# Altium PCB H3-core.PcbDoc (part 2 of 2)
Units mil, origin at the board's own origin, x right, y up, seen from the top; angles counter-clockwise.
Board outline 1574.8 x 1968.5 mil, 4 copper layers (Top Layer, GND, POWER, Bottom Layer), stack 23.756 mil thick; 157 components, 231 nets, 971 pads, 256 vias.
Unrouted connection lines stored in the file: 149.
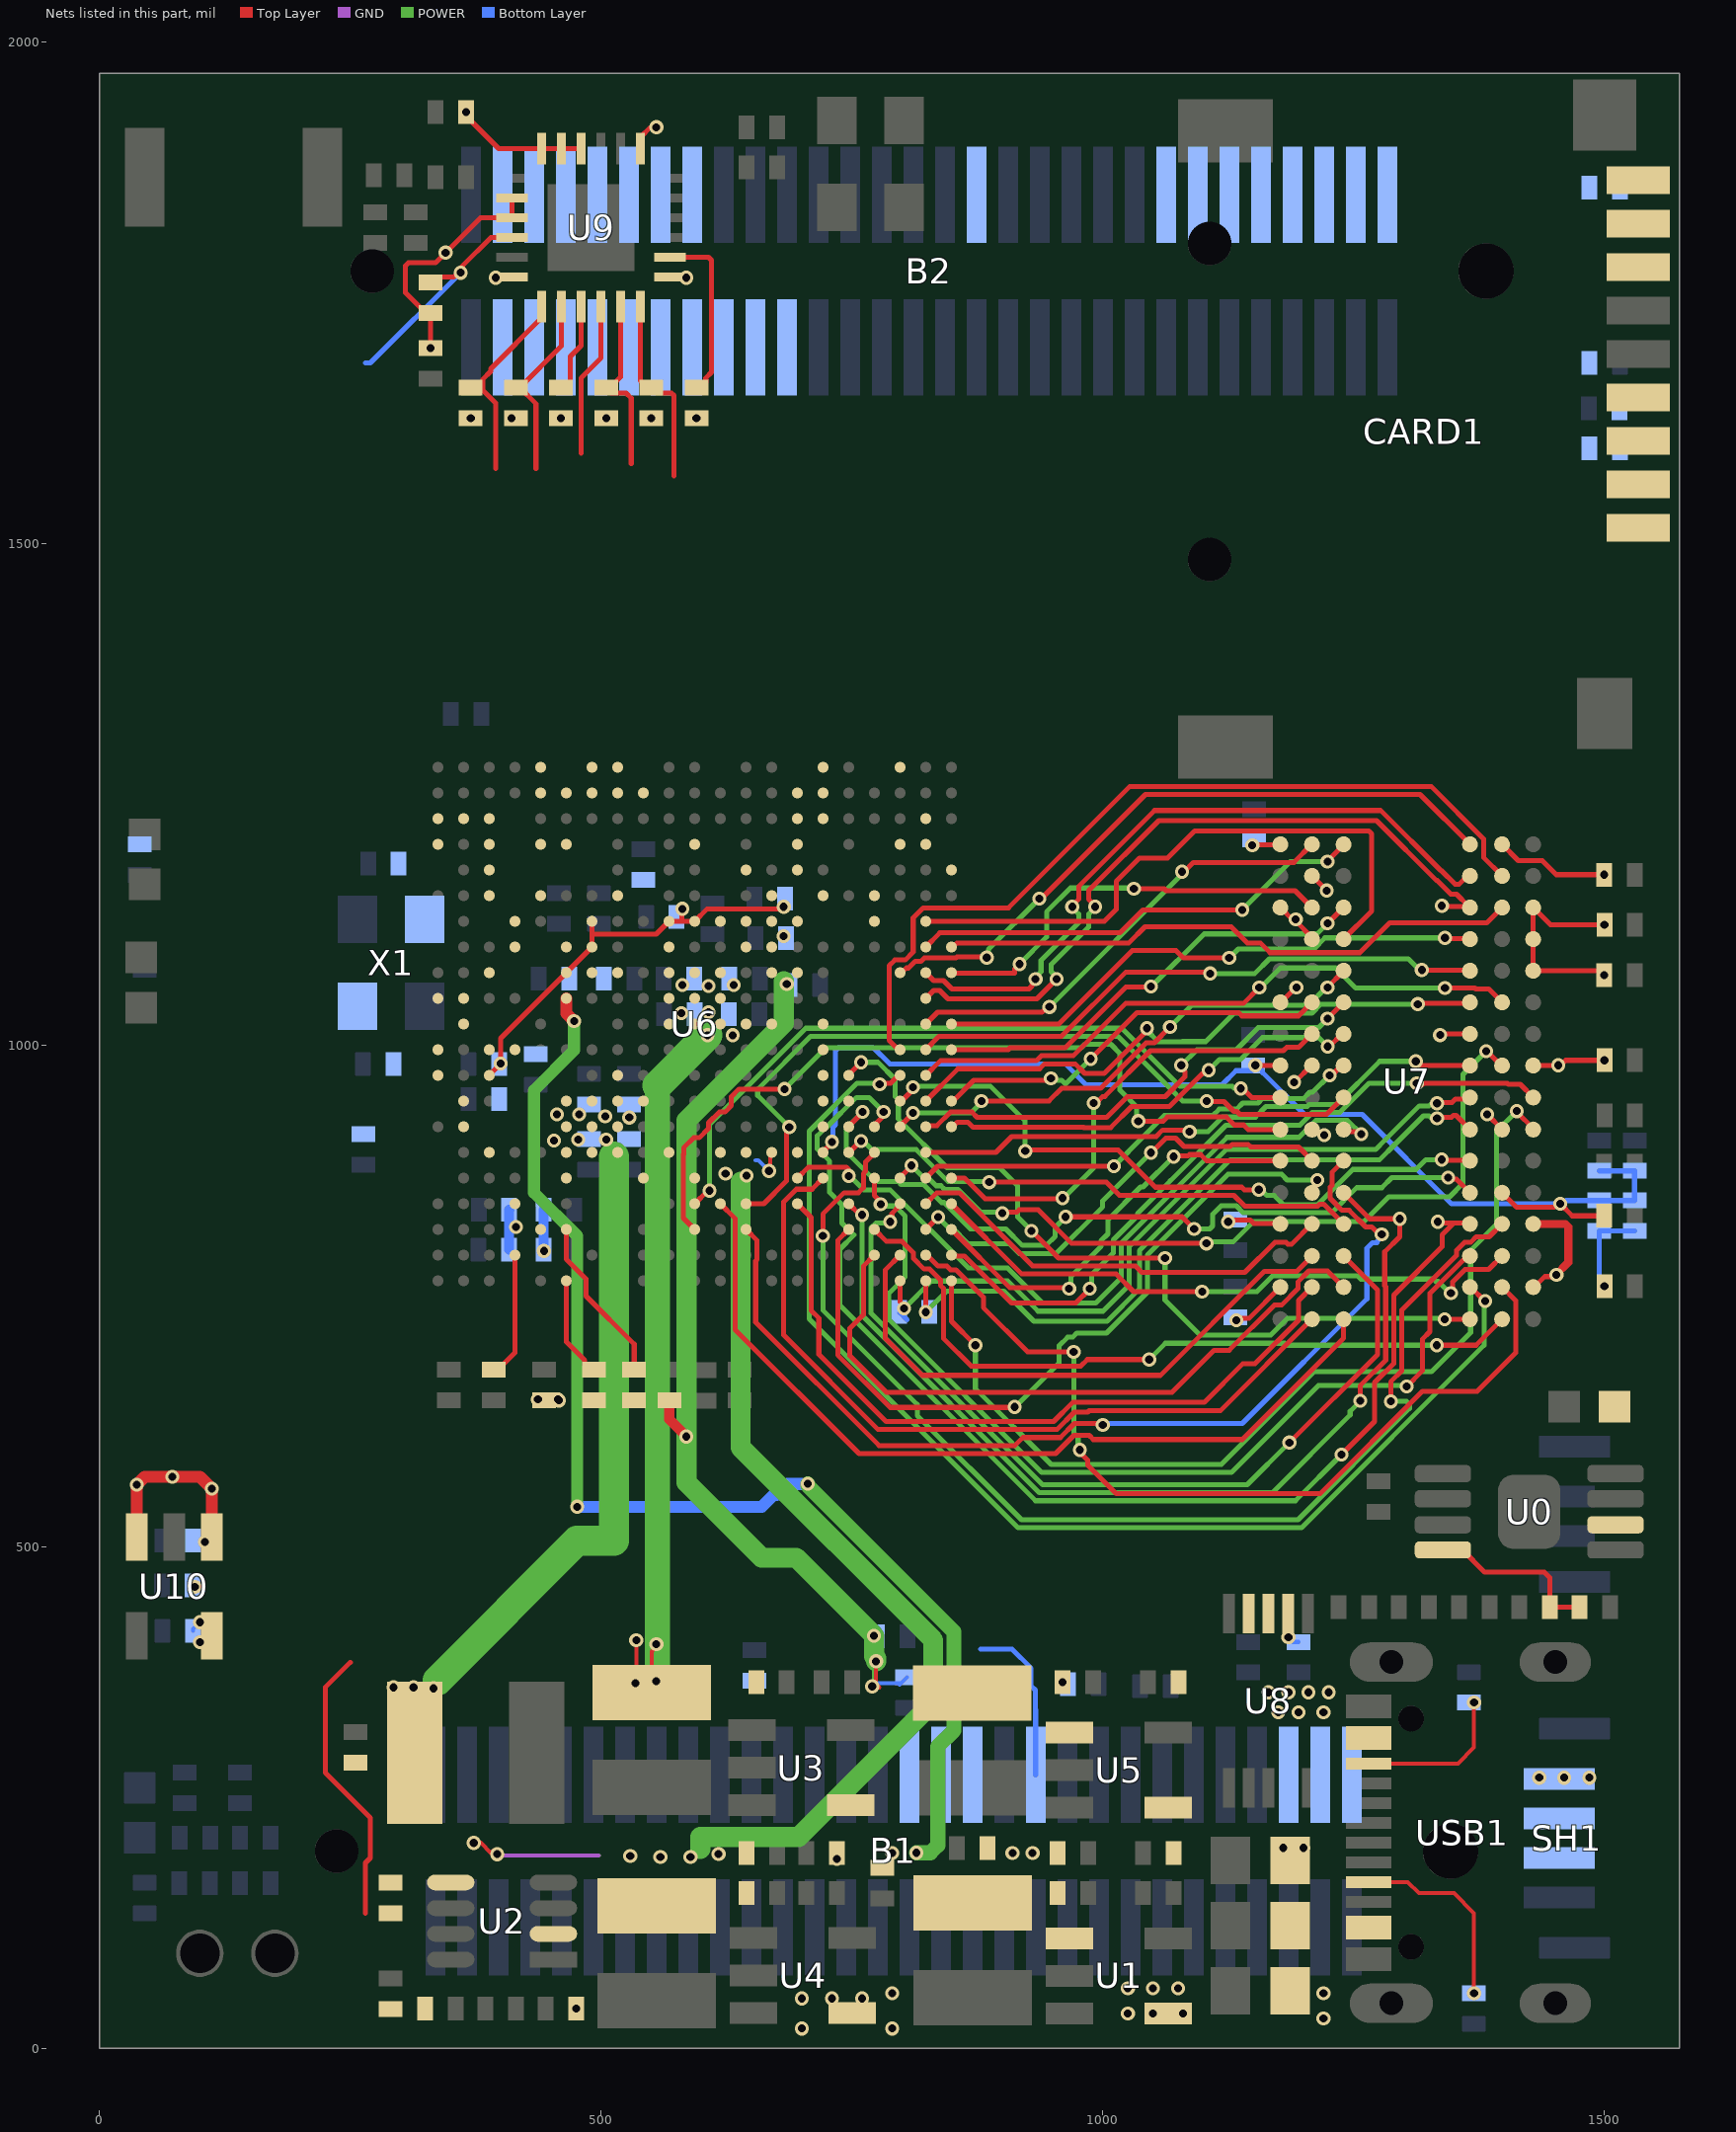
[diagram p4: the nets of this part, all layers, seen from the top]

## Via types
v1: diameter 14, hole 8, Top Layer to Bottom Layer, 255 vias
v2: diameter 15, hole 8, Top Layer to Bottom Layer, 1 vias

## Nets (pads, with @x,y where several pads share a name; then routed paths per layer and width w, separated by ;. In a path a pad name is that pad's centre, name@x,y a point inside that pad or via, vN(x,y) a via of type N, cw(c..) or ccw(c..) an arc to the next point about the centre after c; other vN are vias at no path point) (continued)
NetR33_2: R33.2 USB1.A5 | length 197.8
  Top Layer w4: USB1.A5@1265,165.94 1304.06,165.94 1315,155 1350,155 1370,135 v1(1370,55)
NetR34_2: R34.2 USB1.B5 | length 156.6
  Top Layer w4: USB1.B5@1265,284.06 1354.06,284.06 1370,300 v1(1370,345)
NetR49_1: R49.1 R50.2 U0.4 | length 177.1
  Top Layer w5: U0.4@1339,497 1358.5,497 1380.5,475 1440,475 1445.47,469.53 R49.1@1445.47,440 R50.2@1475.24,440
NMI: R22.2 U6.AA6 | length 102.4
  Top Layer w5: U6.AA6@465.27,765.28 465.27,704.34 483.64,685.97 483.64,682.04 489.01,676.66 R22.2@492.95,676.66
PC4: B2.31 U6.F16
PC7: B2.34 U6.A16
RTC-VIO: C6.2 C12.2 C21.2 C22.2 C25.2 C28.2 C36.1 C40.2 C67.1 CARD1.4 L4.2 L6.2 R13.2 R16.1 R17.1 R21.1 R22.1 R23.1 R24.1 R25.1 R44.2 R45.2 U3.4 U6.G7 U6.G10 U6.G11 U6.G13 U6.G14 U6.G15 U6.H7 U6.H13 U6.H14 U6.J6 U6.J14 U6.J15 U6.N3 | length 1378.2
  Top Layer w4: v1(770.11,361) 771.11,360 777.5,360 774,363.5 v1(774,386)
  Top Layer w5: U6.N3@388.5,970 388.5,970.23 399.79,981.52 399.79,1006.89 U6.J6@465.27,1072.37 U6.H7@490.86,1097.96 490.86,1110.76 ; U6.G7@490.86,1123.55 490.86,1110.76 ; v1@580.43,1135.43 580.43,1123.55 ; v1(682,1138) 679.56,1138 677.56,1136 605.68,1136 U6.G11@593.23,1123.55 580.43,1123.55 ; 490.86,1110.76 554.84,1110.76 U6.G10@567.63,1123.55 580.43,1123.55
  Top Layer w10: R23.1@567.95,645.95 567.95,627.05 v1(585,610)
  POWER w4: v1(770.11,361) 772,362.89 v1@772,391
  POWER w20: v1@682,1064 682,1022 585,925 v1(585,610) 585,564 659.76,489.24 694.24,489.24 v1(772,411.47) 772,391 774,389 v1(774,386)
  Bottom Layer w4: R16.1@398.19,981.19 398.75,981.75 v1(399.79,981.75) ; v1(770.11,361) 773.47,364.36 C28.2@797.36,364.36 ; C28.2@797.5,362.5 797.5,364.36 799.13,364.36 C28.2@805,370.24
  other v1: 959.76,365 458,646 437,647 457,647 685,1061 681.9,1108.86 581,1136
S-TWI-SCK: B1.44 U6.N1
S-TWI-SDA: B1.45 U6.M1
SA0: U6.T17 U7.N3 | length 533.8
  Top Layer w5: U6.T17@746.77,893.23 747.24,893.23 758.51,904.5 v1(758.97,904.5) ; v1(886.76,863.5) 1003.67,863.5 1016.67,850.5 1130.69,850.5 1141.69,839.5 1214.1,839.5 1216.23,841.63 1220.37,841.63 U7.N3@1240,822
  POWER w5: v1(758.97,904.5) 761.41,904.5 769.91,896 813.94,896 845.58,864.36 885.9,864.36 v1(886.76,863.5)
SA1: U6.U18 U7.P7 | length 941.2
  Top Layer w5: U6.U18@772.36,867.64 772.36,850.2 778.63,843.94 v1(778.63,841.5) ; v1(1303,660) 1318.5,675.5 1318.5,707.01 1326,714.51 1326,752.69 1363.31,790 U7.P7@1365.99,790
  POWER w5: v1(778.63,841.5) 780.35,839.78 792.88,839.78 803,829.66 803,769 786.81,752.81 786.81,726.5 939.16,574.16 1128.16,574.16 1215,661 1302,661 v1(1303,660)
SA2: U6.V19 U7.P3 | length 870.5
  Top Layer w5: v1(788.15,824) 789.87,825.72 789.87,832.35 797.95,840.43 U6.V19@797.95,842.05 ; v1(1186,604) 1274,692 1274,756 U7.P3@1240,790
  POWER w5: v1(788.15,824) 786.8,822.65 773.65,822.65 769,818 769,733 940,562 1144,562 v1(1186,604)
SA3: U6.V20 U7.N2 | length 443.9
  Top Layer w5: U6.V20@823.54,842.05 834.54,853.05 856.95,853.05 930,780 1032.46,780 1038.96,773.5 1141.42,773.5 1171.42,803.5 1182.6,803.5 1184.23,801.87 1188.37,801.87 U7.N2@1208.5,822
SA4: U6.V21 U7.P8 | length 619.2
  Top Layer w5: U6.V21@849.13,842.05 919.18,772 1013.35,772 1030.85,754.5 v1(1099,754.5) ; v1(1346.89,753.07) 1348.61,754.79 1348.61,763.99 1361.13,776.5 1384.49,776.5 U7.P8@1397.99,790
  POWER w5: v1(1099,754.5) 1153.49,754.5 1168.99,770 1254.04,770 1257.04,767 1329.67,767 1332.17,764.5 1334.28,764.5 1345.71,753.07 v1(1346.89,753.07)
SA5: U6.Y19 U7.P2 | length 579.4
  Top Layer w5: U6.Y19@797.95,790.87 783.36,776.28 783.36,751.95 783.12,751.71 783.12,707.88 820,671 1057.49,671 1160.99,774.5 1193.5,774.5 1208.5,789.5 U7.P2@1208.5,790
SA6: U6.Y20 U7.R8 | length 879.9
  Top Layer w5: U6.Y20@823.54,790.87 824.82,790.87 835.69,780 844.44,780 848.16,776.28 853.69,776.28 880.98,748.98 880.98,738.51 924.99,694.5 v1(971,694.5) ; v1(977.1,596.66) 977.1,594.22 984.94,586.38 984.94,581.56 1013.5,553 1216.51,553 1318.51,655 1373,655 1411.49,693.49 1411.49,745.5 U7.R8@1397.99,759
  POWER w5: v1(971,694.5) 971,613.66 975.38,609.28 975.38,598.38 v1(977.1,596.66)
SA7: U6.V15 U7.R2 | length 745.2
  Top Layer w5: U6.V15@695.59,842.05 709.47,828.17 709.47,735.53 717,728 717,692 784,625 951,625 970,644 1101,644 1139.7,682.7 1151.8,682.7 1195,725.9 1195,745.5 U7.R2@1208.5,759
SA8: U6.W18 U7.T8 | length 739
  Top Layer w5: U6.W18@772.36,816.46 784.37,804.45 799.93,804.45 811.25,793.13 811.25,787.6 821.93,776.92 827.45,776.92 838.13,766.25 838.13,760.72 841.13,757.72 841.13,707.87 869,680 977.96,680 984.71,686.75 v1(1046.25,686.75) ; v1(1333,701) 1371.99,701 U7.T8@1397.99,727
  POWER w5: v1(1046.25,686.75) 1062.49,703 1181.09,703 1183.09,701 v1(1333,701)
SA9: U6.Y18 U7.R3 | length 678.4
  Top Layer w5: U6.Y18@772.36,790.87 761.36,779.87 761.36,731.36 747.93,717.93 747.93,690.43 784.36,654 1069,654 1111,696 1126,696 1171,741 1178.1,741 1194.41,757.31 1194.41,764 1205.41,775 1224,775 U7.R3@1240,759
SA10: U6.P19 U7.L7 | length 661.9
  Top Layer w5: U6.P19@797.95,944.41 799.41,944.41 810.74,955.74 v1(810.74,958.06) ; v1(922.66,894.5) 923.81,895.66 1015.34,895.66 1052.5,858.5 1138.51,858.5 1141.02,856 v1(1155.52,855.98) ; v1(1337.77,886.02) 1338.28,885.51 1365.48,885.51 U7.L7@1365.99,885
  POWER w5: v1(810.74,958.06) 811.68,959 888.17,959 897.21,949.96 922.66,924.51 v1(922.66,894.5) ; v1(1155.52,855.98) 1157.95,855.98 1163.71,850.23 1170.77,850.23 1180,841 1214,841 1249.19,876.19 1312.19,876.19 1322.02,886.02 v1(1337.77,886.02)
SA11: U6.N19 U7.R7 | length 1201.1
  Top Layer w5: v1(777.5,961) 778.5,962 788.33,962 796.33,970 U6.N19@797.95,970 ; U7.R7@1365.99,759 1366.56,759 1380.57,744.99 v1(1381.14,744.99)
  POWER w5: v1(777.5,961) 776.49,962 755,962 707.47,914.47 707.47,727.21 915.69,519 1198,519 1379.95,700.95 1379.95,743.8 v1(1381.14,744.99)
SA12: U6.R18 U7.N7 | length 1207.2
  Top Layer w5: U6.R18@772.36,918.82 772.36,920.44 779.78,927.86 779.78,931.78 v1(781.5,933.5) ; v1(1238,592) 1271,625 1271,663.77 1290,682.77 1290,751 1338.42,799.42 1338.42,811.14 1350,822.72 1350,823 ; v1(1334,824) 1335,823 1350,823 ; U7.N7@1365.99,822 1364.99,823 1350,823
  POWER w5: v1(781.5,933.5) 781.5,935.5 779.5,935.5 767,948 754.45,948 724.64,918.19 723.97,918.19 715.47,909.69 715.47,896.74 727.74,884.47 727.74,853.26 740,841 740,822.82 752,810.82 738,796.82 738,741 933,546 1192,546 v1(1238,592)
SA13: U6.V12 U7.T3 | length 859.4
  Top Layer w5: U6.V12@618.82,842.05 633.41,827.46 633.41,716.59 757,593 952.94,593 971.1,611.16 986.47,611.16 990.63,607 1139,607 1240,708 U7.T3@1240,727
SA14: U6.N17 U7.T7 | length 809.3
  Top Layer w5: U6.N17@746.77,970 746.77,970.77 v1(759,983) ; v1(929,815) 948,796 956,788 v1(1062,788) ; v1(1340.84,726.84) 1365.83,726.84 U7.T7@1365.99,727
  POWER w5: v1(759,983) 776,983 793,966 793,949 796.24,945.76 796.24,926.47 844.71,878 897,878 915,860 915,829 v1(929,815) ; v1(1062,788) 1062,746 1097,711 1167.28,711 1184.28,728 1339.68,728 v1(1340.84,726.84)
SA15: U6.R17 U7.M7 | length 789.1
  Top Layer w5: U6.R17@746.77,918.82 746.77,919.32 760.45,933 v1(760.45,933.5) ; v1(963,829) 1078.96,829 v1(1091,817) ; v1(1344.32,868.19) 1346.04,866.46 1352.53,866.46 U7.M7@1365.99,853
  POWER w5: v1(760.45,933.5) 744.47,917.52 744.47,893.53 774,864 796.25,864 799,861.25 821.25,861.25 839.25,843.25 841.76,843.25 868.01,817 903.31,817 919.81,800.5 943.5,800.5 952.39,809.39 952.39,818.39 v1(963,829) ; v1(1091,817) 1106.57,817 1109.5,819.93 1109.5,831.5 1118,840 1133.1,840 1140.1,833 1227.99,833 1252.99,858 1278,858 1288.19,868.19 v1(1344.32,868.19)
SBA0: U6.W17 U7.M2 | length 775
  Top Layer w5: U6.W17@746.77,816.46 735.77,805.46 735.77,691.28 788.05,639 911.63,639 v1(912.13,639.5) ; U7.M2@1208.5,853 1208.5,855.98 1212.16,859.63 1212.16,864.01 v1(1213.88,865.74)
  POWER w5: v1(912.13,639.5) 912.63,639.5 956.5,683.37 956.5,700.51 965,709 970,709 974,713 1003.64,713 1044.5,753.86 1044.5,791.01 1124.99,871.5 1178.1,871.5 1183.87,865.74 v1(1213.88,865.74)
SBA1: U6.T18 U7.N8 | length 1168.6
  Top Layer w5: v1(721,810) 721,831.84 742.21,853.05 756.48,853.05 761.36,857.93 761.36,872.2 763.58,874.42 763.58,883.62 772.36,892.4 U6.T18@772.36,893.23 ; v1(1287,645) 1287,664.51 1298,675.51 1298,736 1352.49,790.49 1352.49,795.59 1360.4,803.5 1366.58,803.5 1372.08,809 1384.99,809 U7.N8@1397.99,822
  POWER w5: v1(721,810) 721,736 815,642 815,631 919,527 1194.69,527 1305.62,637.93 1305.62,642.07 1302.69,645 v1(1287,645)
SBA2: U6.V17 U7.M3 | length 994.9
  Top Layer w5: U6.V17@746.77,842.05 757.82,831 v1(760,831) ; U7.M3@1240,853 1266,827 v1(1296,827) 1296,809 1281,794 1281,760.31 1282,759.31 1282,686.08 1256.5,660.58 v1(1256.5,645.56)
  POWER w5: v1(760,831) 760,730.69 936.69,554 1169,554 1246.51,631.51 1246.51,635.05 1256.5,645.04 v1(1256.5,645.56) ; v1(1296,827) v1@1297,826
SCAS: U6.U15 U7.K3 | length 741
  Top Layer w5: U6.U15@695.59,867.64 U6.U15@695.59,867.64 ; U6.U15@695.64,867.69 706.59,878.64 744.36,878.64 746.02,876.98 746.02,870.58 v1(746.86,869.75) ; U7.K3@1240,916 1242.1,913.9 v1@1252.67,913.9
  POWER w5: v1(746.86,869.75) 747.75,869.75 761.49,856 788,856 866,778 905,778 940,743 993.01,743 1018.5,768.49 1018.5,802.81 1123.88,908.19 1195.5,908.19 1212.31,925 1244,925 v1(1257.5,911.5)
SCK_N: R26.2 U6.AA20 U7.K7 | length 712.4
  Top Layer w5: U6.AA20@823.54,765.28 823.59,765.23 v1(823.63,734) v1(823.63,734) ; v1@1334,928 1347.5,928 1349.5,930 1351.99,930 U7.K7@1365.99,916
  POWER w5: v1(823.63,734) 823.63,734.07 844.56,755 901.28,755 931.28,725 1004.32,725 1036.5,757.18 1036.5,795.36 1127.14,886 1275.99,886 1291.57,901.58 1319.62,929.63 1325.12,929.63 1327.12,927.63 1332.63,927.63 v1(1333.13,927.13)
  Bottom Layer w5: v1(823.63,734) R26.2@827.24,734
SCK_P: R26.1 U6.AA19 U7.J7 | length 742.3
  Top Layer w5: U6.AA19@797.95,765.28 797.95,744.31 802.03,740.23 v1(802.03,737.79) ; v1@1334,943 1348,943 1351.5,946.5 1364.49,946.5 U7.J7@1365.99,948
  POWER w5: v1(802.03,737.79) 829.24,765 905.43,765 935.43,735 1000.18,735 1026.5,761.32 1026.5,799.5 1123,896 1271.85,896 1281.57,905.72 1315.48,939.63 1325.12,939.63 1327.12,941.63 1332.63,941.63 v1(1333.13,942.13)
  Bottom Layer w5: v1(802.03,737.79) 797.69,733.45 804.74,726.4
SCKE0: U6.AA21 U7.K9 | length 961.9
  Top Layer w5: U6.AA21@849.13,765.28 849.13,724.87 v1(873,701) ; v1(1412.65,934.4) 1412.65,933.37 1428.99,917.03 U7.K9@1428.99,916
  POWER w5: v1(873,701) 873,657.63 948.47,582.16 1118.16,582.16 1210.5,674.5 1327.5,674.5 1366.64,713.64 1366.64,795.64 1392.26,821.26 1392.26,914 v1(1412.65,934.4)
SCKE1: U6.Y21 U7.J9 | length 713.2
  Top Layer w5: U6.Y21@849.13,790.87 850.13,789.87 862.13,789.87 909,743 973.01,743 987,756.99 v1(987,757.5) ; v1(1313,962) 1314,961 1319,961 1320,962 1403.08,962 1404.08,961 1415.99,961 U7.J9@1428.99,948
  POWER w5: v1(987,757.5) 988.72,759.22 988.72,771.23 1010.5,793 1010.5,806.13 1034.66,830.29 1034.66,832.34 1067.32,865 1122.7,920.38 1196.38,920.38 1209,933 1236.31,933 1265.31,962 v1(1313,962)
SCS0: U6.W20 U7.L2 | length 467.5
  Top Layer w5: U6.W20@823.54,816.46 v1@835.75,828.71 ; v1(1048,893) 1048.44,893 1062.94,907.5 1072.5,907.5 1081,899 1126.75,899 1129,901.25 1144.75,901.25 1147.5,898.5 1195,898.5 U7.L2@1208.5,885
  POWER w5: v1(835.75,828.75) 846.03,818.48 849.52,818.48 866,802 907,802 916.5,792.5 953.5,792.5 999.89,838.89 999.89,844.89 v1(1048,893)
SCS1: U6.W21 U7.L1 | length 427.6
  Top Layer w5: U6.W21@849.13,816.46 907.09,758.5 965.41,758.5 v1(966.41,757.5) ; v1(1070.49,889) 1071.31,889.81 1084.99,889.81 1086.18,891 1097.44,891 1103.44,885 U7.L1@1177.01,885
  POWER w5: v1(966.41,757.5) 968.14,759.22 968.14,769.41 998.31,799.58 998.31,805.25 1005.11,812.05 1005.11,826.11 1037.69,858.69 1040.19,858.69 v1(1070.49,889)
SDC0-CLK: R47.2 U6.D20
SDC0-CMD: CARD1.3 R45.1 U6.F18
SDC0-D0: CARD1.7 U6.A19
SDC0-D1: CARD1.8 U6.D19
SDC0-D2: CARD1.1 U6.C20
SDC0-D3: CARD1.2 U6.E21
SDC0-DET: CARD1.9 R44.1 U6.G18
SDQ0: U6.N20 U7.F8 | length 633
  Top Layer w5: U6.N20@823.54,970 838.13,984.59 933.73,984.59 938.61,989.48 970.48,989.48 1022.67,1041.67 1140.17,1041.67 v1(1156,1057.5) ; v1(1341,1057) 1370.82,1057 1371.82,1056 1384.73,1056 U7.F8@1397.99,1042.74
  POWER w5: v1(1156,1057.5) 1157.5,1057.5 1177,1077 1232,1077 1252,1057 v1(1341,1057)
SDQ1: U6.P21 U7.F2 | length 407.6
  Top Layer w5: U6.P21@849.13,944.41 850.75,944.41 871.34,965 940.86,965 941.12,965.26 946.57,965.26 v1(948.29,966.98) ; v1(988.01,986.5) 1034.13,1032.62 1135.32,1032.62 1138.7,1029.24 1195,1029.24 U7.F2@1208.5,1042.74
  POWER w5: v1(948.29,966.98) 950.01,965.26 958.82,965.26 962.79,961.28 v1(988.01,986.5)
SDQ2: U6.P20 U7.F7 | length 604.3
  Top Layer w5: U6.P20@823.54,944.41 855.72,976.59 937.04,976.59 941.93,981.48 972.52,981.48 982,972 1001.37,972 1044,1014.63 v1(1044,1017) ; v1@1314.87,1041.87 1363.38,1041.87 1364.25,1041 U7.F7@1365.99,1042.74
  POWER w5: v1(1044,1017) 1044,1014.75 1055.13,1003.62 1079.22,1003.62 1079.26,1003.67 1102.67,1003.67 1131,1032 1208.49,1032 1217.49,1041 v1(1314,1041)
SDQ3: U6.U21 U7.G2 | length 473.7
  Top Layer w5: U6.U21@849.13,867.64 862.13,867.62 882.75,847 959.14,847 v1(959.88,847.74) ; v1(991,942.5) 993.44,942.5 999.94,949 1002.02,949 1047.52,994.5 1179.97,994.5 1183.47,998 1195.26,998 U7.G2@1208.5,1011.24
  POWER w5: v1(959.88,847.74) 960.74,847.74 991,878 v1(991,942.5)
SDQ4: U6.R19 U7.E3 | length 508.2
  Top Layer w5: U6.R19@797.95,918.82 797.95,919.25 810.74,932.04 v1(810.74,932.47) ; v1(879,944.5) 946.32,944.5 958.82,957 997.69,957 1043.19,1002.5 1051.38,1002.5 v1(1067,1018.12) ; v1(1224,1057.5) 1224,1057.87 1240,1073.87 U7.E3@1240,1074.24
  POWER w5: v1(810.74,932.47) 868.47,932.47 879,943 v1(879,944.5) ; v1(1067,1018.12) 1088.88,1040 1205.18,1040 1222.68,1057.5 v1(1224,1057.5)
SDQ5: U6.T20 U7.H7 | length 583.1
  Top Layer w5: U6.T20@823.54,893.23 893.45,893.23 909.22,909 1053.13,909 1059.63,915.5 1085.01,915.5 v1(1086.51,914) ; v1(1312,984) 1316.25,979.75 U7.H7@1365.99,979.75
  POWER w5: v1(1086.51,914) 1105.01,914 1119.39,928.38 1152.07,928.38 1162.69,939 1203.69,939 1205.69,941 1233,941 1276,984 v1(1312,984)
SDQ6: U6.U19 U7.H8 | length 790
  Top Layer w5: U6.U19@797.95,867.64 797.95,868.3 809.22,879.56 v1(809.22,880.22) ; v1(899.78,832.5) 900.78,833.5 914.29,833.5 916.79,836 935.49,836 968.99,802.5 v1(1103.28,802.5) ; v1(1382,994) 1382.87,994 1397.12,979.75 U7.H8@1397.99,979.75
  POWER w5: v1(809.22,880.22) 820.19,869.25 824.57,869.25 833.81,860 838.63,860 842.26,856.36 855.7,856.36 878.56,833.5 898.78,833.5 v1(899.78,832.5) ; v1(1103.28,802.5) 1104.78,804 1130.02,804 1150.52,824.5 1260.5,824.5 1285,849 1345.64,849 1359,862.36 1359,971 v1(1382,994)
SDQ7: U6.U20 U7.H3 | length 462.9
  Top Layer w5: U6.U20@823.54,867.64 835.4,879.5 v1(1010.99,879.5) ; v1(1226,970) 1228.13,970 1237.87,979.75 U7.H3@1240,979.75
  POWER w5: v1(1010.99,879.5) 1041.38,909.88 1061.5,930 1109.69,930 1116.07,936.38 1133.38,936.38 1139.4,942.4 1154.77,942.4 1159.37,947 1200.37,947 1206.51,953.14 1209.14,953.14 v1(1226,970)
SDQ8: U6.J19 U7.A7 | length 666.3
  Top Layer w5: U6.J19@797.95,1072.37 799.57,1072.37 804.2,1077 806.31,1077 813.06,1083.74 818.78,1083.74 822,1086.96 853.69,1086.96 854.73,1088 883,1088 v1@884,1087 ; v1(936.75,1146.25) 938.75,1146.25 1042.49,1250 1316.21,1250 U7.A7@1365.99,1200.22
  POWER w5: v1(884.38,1087.38) 886.1,1089.1 886.1,1095.6 v1(936.75,1146.25)
SDQ9: U6.H20 U7.A3 | length 459.5
  Top Layer w5: U6.H20@823.54,1097.96 837.58,1112 1017,1112 1040,1135 v1(1139,1135) ; v1(1224,1183) 1224,1183.61 1240,1199.61 U7.A3@1240,1200.22
  POWER w5: v1(1139,1135) 1187,1183 v1(1224,1183)
SDQ10: U6.H21 U7.C8 | length 586.5
  Top Layer w5: U6.H21@849.13,1097.96 850.75,1097.96 854.79,1102 1026,1102 1042,1118 1128.01,1118 1144.01,1102 1157,1102 1166.77,1092.23 1256.23,1092.23 1286,1122 1382.76,1122 U7.C8@1397.99,1137.23
SDQ11: U6.J21 U7.C2 | length 419.7
  Top Layer w5: U6.J21@849.13,1072.37 849.5,1072 912,1072 912,1076 v1(917,1081) ; v1(1031,1156) 1061.14,1156 1063.14,1154 1191.73,1154 U7.C2@1208.5,1137.23
  POWER w5: v1(917,1081) 944,1108 944,1133 967.7,1156.7 1030.3,1156.7 v1(1031,1156)
SDQ12: U6.L20 U7.A2 | length 460.6
  Top Layer w5: U6.L20@823.54,1021.19 835.35,1033 939.36,1033 944.57,1038.21 v1(946.79,1038.21) ; v1(1079,1173) 1081.06,1173 1090.28,1182.22 1190.51,1182.22 U7.A2@1208.5,1200.22
  POWER w5: v1(946.79,1038.21) 1077.28,1168.69 1077.28,1171.28 v1(1079,1173)
SDQ13: U6.L21 U7.D7 | length 558.5
  Top Layer w5: U6.L21@849.13,1021.19 956.19,1021.19 1029.5,1094.5 1072.78,1094.5 1080.28,1087 v1(1126,1087) ; v1@1341.48,1106.52 1345,1106.52 1345.16,1106.37 1365.36,1106.37 U7.D7@1365.99,1105.73
  POWER w5: v1(1126,1087) 1135,1096 1210.31,1096 1221.31,1107 v1(1341,1107)
SDQ14: U6.M21 U7.C3 | length 449.5
  Top Layer w5: U6.M21@849.13,995.59 905.67,995.59 907.56,997.48 962.48,997.48 1023,1058 1047.5,1058 v1(1048,1058.5) ; v1(1224,1121.5) 1224.14,1121.5 1239.86,1137.23 U7.C3@1240,1137.23
  POWER w5: v1(1048,1058.5) 1048.5,1058.5 1101,1111 1213.5,1111 v1(1224,1121.5)
SDQ15: U6.M19 U7.B8 | length 842
  Top Layer w5: U6.M19@797.95,995.59 796.33,995.59 786.95,1004.97 786.95,1079.2 792.75,1085 803,1085 811,1093 811,1127 821,1137 906,1137 1027,1258 1327.3,1258 1379.49,1205.81 1379.49,1187.22 U7.B8@1397.99,1168.72
SDQM0: U6.M20 U7.E7 | length 585.8
  Top Layer w5: U6.M20@823.54,995.59 836.95,1009 959,1009 1023,1073 1105.5,1073 v1(1107,1071.5) ; v1@1318.38,1074.62 1364.85,1074.62 1365.23,1075 U7.E7@1365.99,1074.24
  POWER w5: v1(1107,1071.5) 1151.5,1071.5 1166,1086 1304.56,1086 1315.56,1075 v1(1318,1075)
SDQM1: U6.G20 U7.D3 | length 616.1
  Top Layer w5: U6.G20@823.54,1123.55 1001.55,1123.55 1013.5,1135.5 1013.5,1163.5 1036.5,1186.5 1064.5,1186.5 1091.72,1213.72 1265.07,1213.72 1268,1210.79 1268,1133.73 U7.D3@1240,1105.73
SDQS0_N: U6.R21 U7.G3 | length 441
  Top Layer w5: U6.R21@849.13,918.82 850.47,918.82 855.06,923.41 865.44,923.41 870.7,918.16 981.02,918.16 981.17,918 1007.86,918 1028.74,938.88 1066.31,938.88 1091.72,964.29 1098.88,971.45 1099.52,971.45 1103.23,975.16 v1(1105.67,975.16) ; v1(1224.17,998.82) 1225.87,998.82 1238.3,1011.24 U7.G3@1240,1011.24
  POWER w5: v1(1105.67,975.16) 1116.17,985.67 1137.16,985.67 1159.15,1007.66 1215.25,1007.66 1224.09,998.82 v1(1224.17,998.82)
SDQS0_P: U6.R20 U7.F3 | length 484.2
  Top Layer w5: U6.R20@823.54,918.82 824.69,919.97 834.72,919.97 848.16,933.41 869.58,933.41 874.84,928.16 986.02,928.16 986.17,928 1003.72,928 1024.59,948.88 1062.17,948.88 1081.72,968.43 1081.72,974.08 1078.23,977.56 v1(1078.23,980) ; v1(1224,1026.5) 1224,1026.62 1240,1042.62 U7.F3@1240,1042.74
  POWER w5: v1(1078.23,980) 1093.9,995.67 1133.02,995.67 1155.01,1017.66 1215.25,1017.66 1224,1026.41 v1(1224,1026.5)
SDQS1_N: U6.J20 U7.B7 | length 692.6
  Top Layer w5: U6.J20@823.54,1072.37 831.34,1064.57 841.37,1064.57 849.74,1056.21 926.36,1056.21 929.28,1059.14 929.28,1059.81 932.98,1063.51 v1(932.98,1065.94) ; v1(969.56,1138.05) 969.56,1139.09 975.94,1145.48 975.94,1158.31 1051.64,1234 1277,1234 1336.78,1174.22 1337.42,1174.22 1351.03,1160.62 1355.17,1160.62 1363.27,1168.72 U7.B7@1365.99,1168.72
  POWER w5: v1(932.98,1065.94) 932.98,1067.86 938.49,1073.37 938.49,1084.56 975.94,1122.01 975.94,1130.62 969.56,1137.01 v1(969.56,1138.05)
SDQS1_P: U6.K20 U7.C7 | length 726
  Top Layer w5: U6.K20@823.54,1046.78 831.34,1054.57 837.23,1054.57 845.59,1046.21 934.29,1046.21 v1(954,1065.92) ; v1(992.33,1138.05) 992.33,1139.09 985.94,1145.48 985.94,1154.16 1055.78,1224 1272.86,1224 1332.63,1164.22 1333.28,1164.22 1346.89,1150.62 1352.6,1150.62 1364.22,1139 1363.33,1138.11 1338.89,1138.11 v1(1338,1139)
  POWER w5: v1(954,1065.92) 954,1067.84 948.49,1073.35 948.49,1080.42 985.94,1117.87 985.94,1130.62 992.33,1137.01 v1(992.33,1138.05)
SODT0: U6.W11 U7.K1 | length 799.6
  Top Layer w5: U6.W11@593.23,816.46 582,827.69 582,891 582.23,891.23 582.23,897.79 592.26,907.82 597.79,907.82 607.12,917.15 607.12,922.67 617.85,933.41 623.38,933.41 629.82,939.85 629.82,948.82 637.35,956.35 v1(682.8,956.35) ; v1(1035.37,924.38) 1060.33,924.38 1064.45,928.5 1123.01,928.5 1131.03,920.48 1140.27,920.48 1144.75,916 U7.K1@1177.01,916
  POWER w5: v1(682.8,956.35) 723.95,997.5 978.5,997.5 982,1001 1008,1001 1017,992 1017,955.38 1033.65,938.73 1033.65,926.1 v1(1035.37,924.38)
SODT1: U6.V11 U7.J1 | length 723.5
  Top Layer w5: U6.V11@593.23,842.05 606.18,855 v1(608,855) ; v1(1137.39,956.9) 1139.53,956.9 1148.43,948 U7.J1@1177.01,948
  POWER w5: v1(608,855) 608,921 704,1017 1019,1017 1077,959 1129.01,959 1130.77,957.24 1137.06,957.24 v1(1137.39,956.9)
SPI0_CLK: B2.33 U6.B16
SPI0_CS: B2.38 U6.B15
SPI0_MISO: B2.32 U6.C16
SPI0_MOSI: B2.37 U6.C15
SRAS: U6.V13 U7.J3 | length 800.5
  Top Layer w5: U6.V13@644.41,842.05 662.05,842.05 684.59,864.59 684.59,913.1 687.5,916.01 v1(687.5,918.44) ; v1(1103.69,944.5) 1104.32,943.87 1120.69,943.87 1130.6,933.95 1133.55,933.95 1136.5,931 1223,931 U7.J3@1240,948
  POWER w5: v1(687.5,918.44) 656,949.94 656,956 709,1009 1015,1009 1079.5,944.5 v1(1103.69,944.5)
SRST: U6.U16 U7.T2 | length 793
  Top Layer w5: U6.U16@721.18,867.64 710.09,856.55 694.53,856.55 682,844.02 682,711 776,617 954.31,617 971.72,634.41 984.91,634.41 986.5,636 1117.5,636 U7.T2@1208.5,727
STATUS-LED: R15.1 U6.F14
SVREF: C41.2 C42.2 C43.1 C52.2 R31.1 R32.2 U6.T16 U7.H1 U7.M8 | length 1177.7
  Top Layer w5: U6.T16@721.18,893.23 721.18,894.06 729.97,902.86 v1(729.97,903.69) ; v1(1152,980) 1152.13,979.87 1176.88,979.87 U7.H1@1177.01,979.75 ; U7.M8@1397.99,853 1400,853 1400,850.99 1412.49,838.5 v1@1450.06,838.5 ; v1(1456,842) 1468,830 C41.2@1499.76,830
  Bottom Layer w5: v1(729.97,903.69) 731,904.72 731,918.19 733.5,920.69 733.5,994.57 736.43,997.5 771.5,997.5 787.52,981.48 962.52,981.48 983.34,960.66 1118.87,960.66 1132.83,974.63 1148.56,974.63 1153.94,980 1159.31,974.63 1159.31,972.69 1201,931 1258.51,931 1347.51,842 v1(1456,842) ; v1@1461.67,845.24 R31.1@1495,845.24 C43.1@1530,845.24 C52.2@1530,874.76 R32.2@1495,874.76
SWE: U6.W13 U7.L3 | length 1002.2
  Top Layer w5: U6.W13@644.41,816.46 655.41,805.46 655.41,786.31 654,784.9 654,724 777,601 912.31,601 920.31,609 957.63,609 971.63,623 998.5,623 v1(1000,621.5) ; U7.L3@1240,885 1228.38,873.38 1228.38,860.47 1226.5,858.59 1226.5,847.41 1238.41,835.5 1245.59,835.5 1262.09,819 1268.07,819 1275.56,811.51 v1(1278,811.51)
  Bottom Layer w5: v1(1000,621.5) 1001.5,623 1139,623 1263.25,747.25 1263.25,797.75 1268.75,803.24 1273.31,803.24 1273.31,804.38 1278,809.07 v1(1278,811.51)
UART0_RX: B2.55 U6.H6 U8.8
UART0_TX: B2.57 U6.F5 U8.9
UART1_CTS: B2.4 U6.E3
UART1_RTS: B2.2 U6.C3
UART1_RX: B2.3 U6.D3
UART1_TX: B2.5 U6.G4
UART2_CTS: B2.53 U6.E13
UART2_RTS: B2.56 U6.D6
UART2_RX: B2.58 U6.D5
UART2_TX: B2.54 U6.D11
UART3_CTS: B2.36 U6.D15
UART3_RX: B2.44 U6.G12
UART3_TX: B2.35 U6.E15
UBOOT: R25.2 U6.W6 | length 168.1
  Top Layer w5: U6.W6@465.27,816.46 465.27,786.73 485,767 485,750 532.95,702.05 R25.2@532.95,676.43
USB0-DRVVBUS: B1.43 U6.P2
USB0-IDDET: B2.59 U6.D1
USB-5V: B1.31 B1.32 B1.33 C1.2 C3.2 C8.2 C11.2 C54.2 C55.2 C56.2 C57.2 C59.1 C77.2 R43.2 SH1.1 U0.6 U1.1 U1.4 U2.2 U4.4 U5.1 U5.4 U8.7 U10.1 U10.3 USB1.A4B9 USB1.B4A9 | length 333.2
  Top Layer w4: v1(373,205) 380,205 390,195 392.5,197.5 v1(396.25,193.75) ; v1(735,189) C8.2@735,195
  Top Layer w12: U10.3@37.05,509.85 v1(37.05,562.05) 45,570 100,570 v1(111.85,558.15) U10.1@111.85,509.85
  GND w4: v1(396.25,193.75) 397.5,192.5 497.5,192.5
  Bottom Layer w4: v1(1185,410) 1189.76,405.24 C54.2@1195,405.24
  other v1: 700,20 790,20 1220,30 1025,35 1050,35 1080,35 475.24,40 700,50 730,50 760,50 790,55 1220,55 1025,60 1050,60 1075,60 1180,200 1200,200 1435,270 1460,270 1485,270 1175,335 1195,335 1220,335 1165,355 1185,355 1205,355 1225,355 95,460 105,505 72.5,570
USB-DM0: B2.6 U6.B5
USB-DM1: SH1.3 U6.B6
USB-DM2: B2.8 U6.A7
USB-DM3: B2.11 U6.B8
USB-DP0: B2.7 U6.A5
USB-DP1: SH1.2 U6.B7
USB-DP2: B2.9 U6.A8
USB-DP3: B2.10 U6.B9
VCC-CPU-1.5V: C4.2 C13.2 C14.2 C15.2 C16.2 L2.2 R4.2 U2.5 U6.N8 U6.P6 U6.P7 U6.P8 U6.P9 U6.R6 U6.R7 U6.R8 U6.T6 U6.T7 U6.T8 U6.U6 U6.U9 | length 616.5
  POWER w30: 337,367 476,506 513,506 513,888.96
  other v1: 333,359 293,360 313,360 453,905 477,906 505,906 528,928 504,929 456,931 478,931
VCC-DRAM: C9.2 C43.2 C44.2 C45.2 C46.2 C47.2 C48.2 C49.2 C50.2 C51.2 L5.2 R11.2 R31.2 U6.L16 U6.M16 U6.N16 U6.P16 U6.P17 U6.R16 U6.T12 U6.T13 U6.T14 U6.T15 U6.U11 U7.A1 U7.A8 U7.B2 U7.C1 U7.C9 U7.D2 U7.D9 U7.E9 U7.F1 U7.G7 U7.H2 U7.H9 U7.K2 U7.K8 U7.N1 U7.N9 U7.R1 U7.R9 | length 1875.2
  Top Layer w4: v1(667.25,874.75) 668.66,876.17 668.66,891.89 U6.T14@670,893.23
  Top Layer w5: v1(1125,824) 1126.72,825.72 1139.16,825.72 1139.3,825.86 1147.01,825.86 1150.37,822.5 1176.51,822.5 U7.N1@1177.01,822 ; v1(1133,726) 1134.72,727.72 1145.73,727.72 U7.R1@1177.01,759 ; v1(1149,1199.22) 1149.5,1199.72 1176.51,1199.72 U7.A1@1177.01,1200.22 ; U7.F1@1177.01,1042.74 1177.62,1042.74 1192.38,1057.5 v1(1193,1057.5) ; U7.C1@1177.01,1137.23 v1@1190.52,1123.72 ; v1(1190.75,963.25) 1191.38,963.25 1207.87,979.75 U7.H2@1208.5,979.75 ; v1(1192.3,1125.5) v1@1190.52,1123.72 ; U7.K2@1208.5,916 1211.48,916 1215.26,912.22 1219.05,912.22 v1(1220.77,910.5) ; U7.D2@1208.5,1105.73 1208.5,1107.52 1192.3,1123.72 v1@1190.52,1123.72 ; U7.B2@1208.5,1168.72 1208.59,1168.72 1223.11,1154.2 v1(1223.19,1154.2) ; v1@1337,1011 1337.12,1011.12 1365.63,1011.12 1365.75,1011 U7.G7@1365.99,1011.24 1365.99,1011.01 U7.G7@1366.23,1011.01 ; v1(1383,931) U7.K8@1397.99,916 ; U7.A8@1397.99,1200.22 1414.21,1184 1438,1184 1452,1170 v1(1499.76,1170) ; U7.R9@1428.99,759 1430.08,759 1440.5,769.42 1450.42,769.42 v1(1452.14,771.14) 1452.14,771.71 1458.07,777.64 ; U7.H9@1428.99,979.75 1429.12,979.87 1453.87,979.87 v1(1454,980) 1456.44,980 1461.44,985 v1(1500,985) ; v1(1499.76,1070) 1495.53,1074.24 U7.E9@1428.99,1074.24 U7.D9@1428.99,1105.73 U7.C9@1428.99,1137.23 1446.22,1120 v1(1500,1120) C49.2@1499.76,1120.24
  Top Layer w8: U7.N9@1428.99,822 1461.07,822 1464,819.07 1464,783.57 1458.07,777.64
  POWER w20: 599,199 599,211 697,211 831,345 831,407 639,599 639,864
  Bottom Layer w4: 654,885.5 656.5,885.5 v1(667.25,874.75)
  Bottom Layer w5: v1(1125,824) 1129.76,824 C51.2@1132,826.24 ; v1(1500,760) 1500,762 1495,767 R31.2@1495,814.76 C43.2@1530,814.76
  other v1: 559,191 589,191 529,192 617,194 645,870 624,872 1336.19,1010.19
VCC-IO-EN: B1.41 U6.R2 | length 166.5
  Bottom Layer w5: 878,398 909.7,398 928.58,379.12 928.58,361.42 932.78,357.22 932.78,337.94 933.07,337.65 B1.41@933.07,272.83
VCC-RTC: C2.2 L1.2 R1.2 R3.2 R7.2 U6.K6 | length 1235.8
  Top Layer w12: U6.K6@465.27,1046.78 465.27,1031.73 v1(473,1024)
  POWER w12: v1(473,1024) 473,995 433,955 433,853 476,810 v1(476,540)
  POWER w15: v1(706.06,563.06) 706.06,560.94 851.5,415.49 851.5,317 835.5,301 835.5,202.5 828.11,195.11 v1(814.11,195.11)
  Bottom Layer w12: v1(476,540) 660.06,540 671.73,551.67 675.06,551.67 686.06,562.67 705.67,562.67 v1(706.06,563.06)
  other v1: 790,195 910,195 930,195
VCC-SYS-1.2V: C7.2 C17.2 C18.2 C19.2 C20.2 L3.2 R5.1 R9.2 U6.H10 U6.J10 U6.J11 U6.J12 U6.K10 U6.K11 U6.K12 U6.L10 U6.L11 U6.L12 U6.L13 U6.L14 | length 772
  Top Layer w4: v1(535,407) 535,370.24 L3.2@550.24,355 550.24,365 550.24,395.53 555,400.29 v1(555,403)
  POWER w25: v1@556,367 556,388 556,444 556,960
  POWER w30: 556,960 v1(606,1010)
  other v1: 534,364 555,366 631,1010 580,1032 607,1033 607,1059 581,1060 632,1060
VCC-WIFI: C58.1 C60.1 C64.1 R35.2 R36.2 R37.2 R38.2 R39.2 R40.2 R41.2 U9.1 U9.4 U9.5 U9.6 U9.8 U9.9 U9.12 U9.19 U10.5 | length 419.9
  Top Layer w4: v1(410.5,1625) R38.2@415,1625
  Top Layer w5: v1(330,1695) R35.2@330,1729.76 324.63,1735.14 319.86,1735.14 305,1750 305,1777.07 307.93,1780 335,1780 379.84,1824.84 U9.9@411.26,1824.84 U9.8@411.26,1844.53 ; v1(365.47,1930) 365.47,1926.06 397.8,1893.74 U9.6@440.79,1893.74 U9.5@460.47,1893.74 U9.4@480.16,1893.74 ; U9.1@539.21,1893.74 539.21,1904.96 549.25,1915 v1(555,1915)
  Bottom Layer w4: C60.1@93.42,416.42 93.42,418.42 v1(100,425)
  other v1: 100,405 370,1625 460,1625 505,1625 550,1625 595,1625 395,1765 585,1765 345,1790
VDD-CPUS: C23.2 C35.2 U6.J7 U6.J8 U6.M4
VDD-EPHY: C39.2 R5.2 U6.F8
VDD_CPUFB: C5.2 R4.1 R6.2 U6.T10 | length 281.1
  Top Layer w5: 250,385 225,360 225,275 270,230 270,190 265,185 265,135
VRA1: C26.2 U6.Y4 | length 125.5
  Top Layer w5: C26.2@392.95,676.43 396.89,676.43 414.09,693.63 U6.Y4@414.09,790.87
VRA2: C24.2 R19.1 U6.W5 | length 40
  Bottom Layer w10: C24.2@442.71,796.19 R19.1@442.71,836.19
  other v1: 443,795
VRP: C27.2 C29.2 U6.V4 | length 40.1
  Bottom Layer w10: C27.2@408.19,796.19 408.3,796.31 408.3,836.07 C29.2@408.42,836.19
  other v1: 415,819
WL-PMU-EN: R35.1 U6.T3 U9.10 | length 235.1
  Top Layer w5: R35.1@330,1760.24 335.37,1765.61 353.17,1765.61 357.56,1770 v1(360,1770) 361.72,1771.72 361.72,1776.72 390.16,1805.16 U9.10@411.26,1805.16
  Bottom Layer w5: 265,1680 270,1680 v1(360,1770)
WL-SDIO-CLK: U6.J3 U9.16 | length 154.5
  Top Layer w5: 480,1590 480,1665 499.84,1684.84 U9.16@499.84,1736.26
WL-SDIO-CMD: R39.1 U6.L2 U9.15 | length 91.4
  Top Layer w5: R39.1@460,1655.47 463.94,1655.47 469.31,1660.85 469.31,1686.5 480.16,1697.35 U9.15@480.16,1736.26
WL-SDIO-D0: R40.1 U6.H4 U9.17 | length 183.5
  Top Layer w5: U9.17@519.53,1736.26 519.53,1666.07 508.94,1655.47 R40.1@505,1655.47 510.37,1650.1 524.9,1650.1 530,1645 530,1580
WL-SDIO-D1: R41.1 U6.F3 U9.18 | length 193.4
  Top Layer w5: U9.18@539.21,1736.26 539.21,1662.33 546.06,1655.47 R41.1@550,1655.47 555.37,1650.1 569.9,1650.1 572.45,1647.55 572.45,1567.45
WL-SDIO-D2: R37.1 U6.C2 U9.13 | length 191
  Top Layer w5: 395,1575 395,1640 381.97,1653.03 381.97,1663.74 390,1671.77 390,1674.25 440.79,1725.04 U9.13@440.79,1736.26
WL-SDIO-D3: R38.1 U6.C1 U9.14 | length 189.1
  Top Layer w5: R38.1@415,1655.47 R38.1@418.94,1655.47 ; 435,1575 435,1639.41 R38.1@418.94,1655.47 ; U9.14@460.47,1736.26 460.47,1697.01 R38.1@418.94,1655.47
WL-WAKE-AP: R36.1 U6.M3 U9.20 | length 177.8
  Top Layer w5: U9.20@568.74,1785.47 607.07,1785.47 610,1782.54 610,1670.71 604.31,1665.02 604.31,1661.08 598.94,1655.71 R36.1@595,1655.71
XIN: C37.2 U6.K1 X1.1
XOUT: C38.2 U6.K2 X1.3
pads on no net: B1. B2. CARD1. H1.0 SH1.0 U0.9 U2.1 U6.A1 U6.AA2 U6.AA8 U6.AA9 U6.AA11 U6.AA12 U6.AA14 U6.AA15 U6.AA17 U6.AA18 U6.B2 U6.F10 U6.K4 U6.L5 U6.P3 U6.T5 U6.U4 U6.V1 U6.V5 U6.W1 U6.W9 U6.W12 U6.W15 U6.Y2 U6.Y7 U6.Y8 U6.Y9 U6.Y10 U6.Y11 U6.Y12 U6.Y13 U6.Y14 U6.Y15 U6.Y16 U6.Y17 U8.4 U8.5 U8.6 U9.11 U9.21 U10.4 USB1. USB1.1 USB1.2 USB1.3 USB1.4 USB1.A8 USB1.B8

## Polygon pours and split planes (outlines as drawn)
VCC-DRAM on Top Layer "VCC-DRAM_L01_P017" (solid, pour order 17): 588,860 598,860 598,868 608,870 682,870 695,884 757,946 749,954 747,952 728,952 728,1027 727,1028 713,1028 713,919 698,904 616,904 585,873 585,863
RTC-VIO on Top Layer "RTC-VIO_L01_P015" (solid, pour order 15): 635,1135 635,1090 639,1086 660,1086 660,1067 666,1061 667,1062 705,1062 705,1084 706,1085 682,1085 682,1109 685,1112 706,1112 706,1135
VCC-SYS-1.2V on Top Layer "VCC-SYS-1.2V_L01_P012" (solid, pour order 12): 678,1029 679,1028 679,1011 558,1011 555,1014 555,1108 578,1108 579,1109 581,1107 581,1087 603,1087 605,1085 628,1085 628,1067 629,1060 629,1032 672,1032
VCC-CPU-1.5V on Top Layer "VCC-CPU-1.5V_L01_P011" (solid, pour order 11): 506,979 526,979 526,958 529,955 549,955 549,935 544,930 527,930 527,887 498,887 475,864 475,858 455,858 453,860 453,950 460,957 505,957
NetL2_1 on Top Layer "NETL2_1_L01_P008" (solid, pour order 8): 465,260 490,235 490,125 485,120 410,120 410,180 405,185 405,260
USB-5V on Top Layer "USB-5V_L01_P007" (solid, pour order 7): 960,325 1055,325 1100,280 1070,250 1015,250 1015,265 985,295 975,295
USB-5V on Top Layer "USB-5V_L01_P002" (solid, pour order 2): 1100,270 1120,270 1170,220 1170,185 1110,185 1100,195 1090,185 1070,185 1070,195 1040,225 1040,235
USB-5V on Top Layer "USB-5V_L01_P001" (solid, pour order 1): 1265,130 1240,130 1225,145 1225,200 1210,215 1160,215 1160,40 1155,35 1170,20 1230,20 1230,95 1245,110 1285,110
USB-5V on Top Layer "USB-5V_L01_P000" (solid, pour order 0): 1202.5,420 1180,420 1070,375 1070,340 1090,340 1090,295 1080,285 1040,285 1040,225 1105,225 1105,300 1115,310 1220,310 1220,305 1230,295 1235,300 1257.5,300
VCC-DRAM on Bottom Layer "VCC-DRAM_L04_P019" (solid, pour order 19): 622,917 804,917 1120,1233 1121,1232 1566,1232 1566,699 626,699 623,702
USB-5V on Bottom Layer "USB-5V_L04_P004" (solid, pour order 4): 1175,225 1255,225 1255,370 1175,370
USB-5V on POWER "USB-5V_L03_P003" (solid, pour order 3): 270,200 275,195 1155,195 1155,390 1375,390 1490,275 1490,5 270,5
USB-5V on POWER "USB-5V_L03_P009" (solid, pour order 9): 375,10 205,180 205,520 130,595 5,595 5,5
VCC-WIFI on POWER "VCC-WIFI_L03_P010" (solid, pour order 10): 310,1605 610,1605 610,1640 615,1645 495,1645 495,1760 575,1760 580,1755 600,1755 600,1930 610,1940 340,1940 340,1825 305,1790

## Keep-outs
Keep-Out Layer:
  the board outline again, w10

## Other copper
Top Layer:
  rectangle net RTC-VIO: 758,353 785,423
  rectangle net VCC-SYS-1.2V: 526,359 564,413
  rectangle net VCC-DRAM: 504,155 652,208
  rectangle net RTC-VIO: 452,642 560,653
  rectangle net VCC-CPU-1.5V: 245,275 305,295
  rectangle net USB-5V: 380,105 400,210
  rectangle net USB-5V: 370,185 405,210
  rectangle net NetC5_1: 350,30 365,75
  rectangle net NetC5_1: 280,60 365,75
  rectangle net RTC-VIO: 745,340 810,380
  rectangle net NetR13_1: 1005,325 1030,375
  rectangle net NetR13_1: 1005,315 1075,335
  rectangle net RTC-VIO: 730,230 805,250
  rectangle net RTC-VIO: 785,230 805,310
  rectangle net RTC-VIO: 785,295 830,380
  rectangle net VCC-SYS-1.2V: 590,355 660,375
  rectangle net NetC5_1: 275,65 295,120
  rectangle net NetC5_1: 275,105 345,120
  rectangle net VDD_CPUFB: 255,30 270,140
  rectangle net VDD_CPUFB: 255,30 300,45
  rectangle net VDD_CPUFB: 255,130 300,140
  rectangle net VCC-CPU-1.5V: 285,160 360,285
  rectangle net USB-5V: 390,105 465,120
  rectangle net VDD_CPUFB: 280,30 330,45
  rectangle net NetC5_1: 350,30 390,50
  rectangle net VCC-RTC: 765,175 830,195
  rectangle net VCC-RTC: 810,155 830,195
  rectangle net NetR11_1: 690,100 710,165
  rectangle net NetR11_1: 690,100 755,120
  rectangle net NetL3_1: 495,230 670,255
  rectangle net NetR9_1: 710,305 730,360
  rectangle net NetR9_1: 680,355 725,375
  rectangle net RTC-VIO: 905,355 960,375
  rectangle net NetL6_1: 815,230 970,250
  rectangle net VCC-DRAM: 595,145 645,165
  rectangle net NetR11_1: 665,145 710,165
  rectangle net NetL5_1: 555.24,25 675,47.76
  rectangle net USB-5V: 690,10 800,65
  rectangle net VCC-RTC: 915,185 955,210
  rectangle net VCC-RTC: 880,145 930,210
  rectangle net VCC-RTC: 945,145 965,210
  rectangle net USB-5V: 985,100 1025,125
  rectangle net USB-5V: 1005,60 1025,125
  rectangle net NetR1_1: 980,145 1035,165
  rectangle net NetR1_1: 1035,100 1050,145
  rectangle net NetL1_1: 905,25 990,45
  rectangle net USB-5V: 1010,25 1090,70
POWER:
  rectangle net VCC-DRAM: 618,863 675,886
  rectangle net VCC-DRAM: 518,180 624,207
  region net RTC-VIO: 785,353 785,421 759,421 759,353
  rectangle net RTC-VIO: 674,1054 690,1143
  region net VCC-SYS-1.2V: 560,351 560,425 531,425 531,351
  rectangle net VCC-SYS-1.2V: 571,1003 640,1070
  rectangle net VCC-CPU-1.5V: 444,887 531,943
  rectangle net VCC-CPU-1.5V: 286,352 341,375
  rectangle net VCC-RTC: 780,180 960,210
Bottom Layer:
  rectangle net VCC-DRAM: 621,875 687,896
  rectangle net VCC-DRAM: 616,862 651,883
  rectangle net VCC-SYS-1.2V: 577,1011 640,1083
  rectangle net VCC-CPU-1.5V: 457,891 539,954
  rectangle net AVCC: 830,335 920,345
  rectangle net RTC-VIO: 761,357 851,382
  rectangle net NetR13_1: 992,343 1037,383

## Text inside footprints (layer, text, board x,y; h text height)
X1: Bottom Overlay "*" at 179.27,953.81 h23.62 r270
X2: Top Overlay "*" at 880,1750 h23.62 r90